# Altium PCB REF-Base.PcbDoc (part 2 of 2)
Units mm, origin at the board's own origin, x right, y up, seen from the top; angles counter-clockwise.
Board outline 48.01 x 58 mm, 4 copper layers (Top1, VCC, GND, Bottom2), stack 1.833 mm thick; 98 components, 129 nets, 444 pads, 192 vias.
Unrouted connection lines stored in the file: 57.
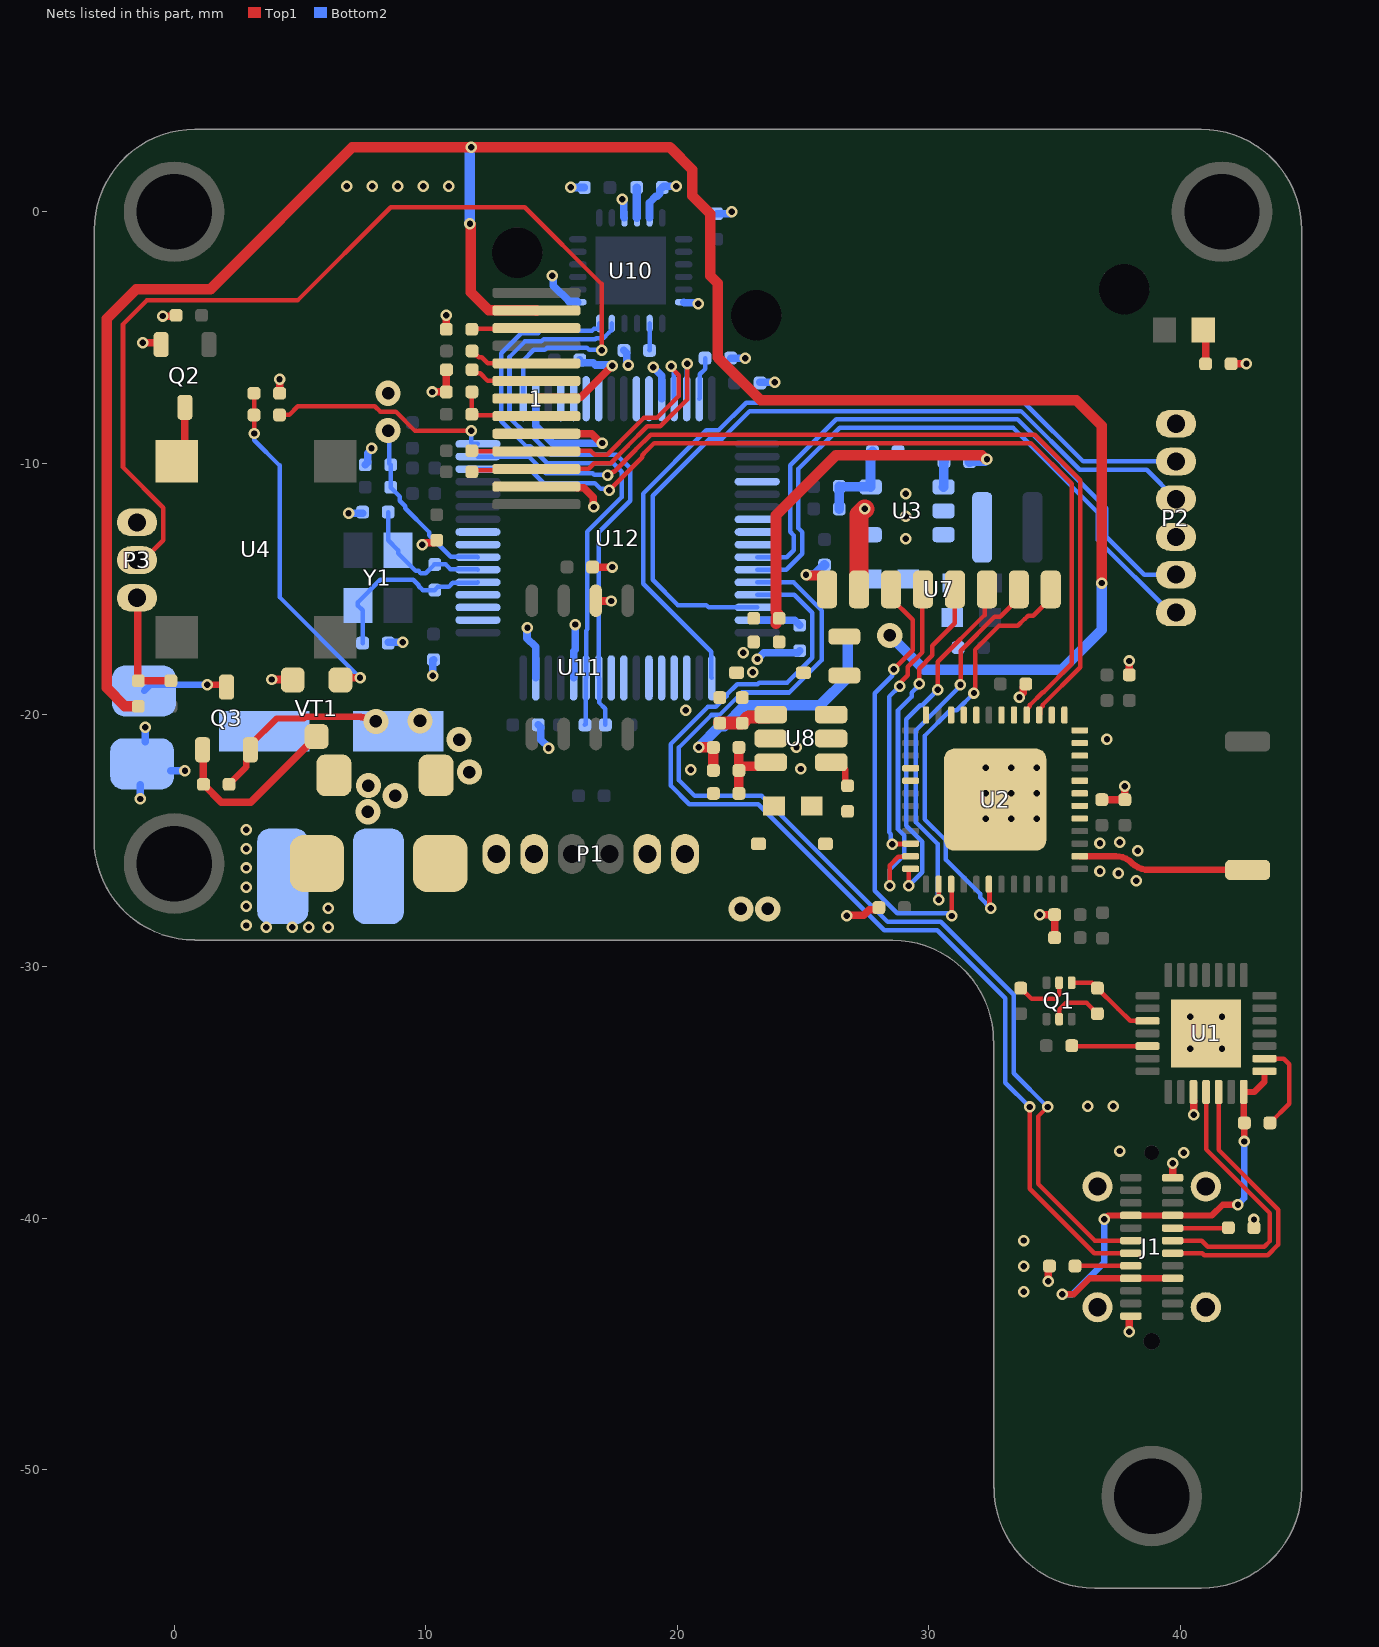
[diagram p4: the nets of this part, all layers, seen from the top]

## Via types
v1: diameter 0.457, hole 0.254, Top1 to Bottom2, tented both sides, 178 vias
v2: diameter 1, hole 0.5, Top1 to Bottom2, tented both sides, 12 vias
v3: diameter 0.457, hole 0.254, Top1 to Bottom2, 2 vias

## Nets (pads, with @x,y where several pads share a name; then routed paths per layer and width w, separated by ;. In a path a pad name is that pad's centre, name@x,y a point inside that pad or via, vN(x,y) a via of type N, cw(c..) or ccw(c..) an arc to the next point about the centre after c; other vN are vias at no path point) (continued)
GND: 1.7 1.9 1.12 C1.1 C2.1 C3.2 C4.1 C5.1 C6.2 C7.2 C9.2 C10.1 C14.1 C15.1 C16.1 C17.1 C18.1 C19.1 C20.2 C21.1 C22.1 C23.2 C24.1 C25.1 C26.1 C27.1 C28.1 C29.1 C30.1 C31.1 C34.1 C35.1 C36.1 C37.1 D3.1 D4.1 J1.A1 J1.B1 J1.S1 J1.S2 J1.S3 J1.S4 P1.5 P1.6 P2.1 P2.4 P3.3 pad.@4.318,-26.416 pad.@-1.27,-21.946 Q2.2 R8.2 R9.2 R10.1 R14.1 R15.2 R18.1 R22.2 R26.2 R35.1 U1.3 U1.29 U2.49 U3.2 U7.2 U8.2 U10.1 U10.9 U10.11 U10.18 U11.2 U12.18 U12.28 U12.60 U12.63 VT1.2 | length 51.8
  Top1 w0.3: v1(-1.245,-5.207) Q2.2@-0.686,-5.207 ; v1(-0.457,-4.144) R10.1@0.102,-4.144 ; v1(3.886,-18.593) VT1.2@4.445,-18.593 ; R15.2@4.191,-7.214 v1(4.191,-6.655) v1@4.242,-6.604 ; v1(9.859,-13.242) 9.901,-13.242 9.984,-13.16 10.335,-13.16 R26.2@10.439,-13.056 ; v1@10.236,-7.137 v1(10.262,-7.163) C26.1@10.82,-7.163 10.824,-7.159 10.824,-6.283 R22.2@10.827,-6.279 ; C27.1@10.82,-4.674 v1(10.82,-4.115) ; 1.9@14.402,-8.825 16.608,-8.825 16.976,-9.193 v1(17.018,-9.193) ; 1.7@14.402,-7.425 14.452,-7.375 16.171,-7.375 v1(17.424,-6.121) ; 1.12@15.949,-10.922 16,-10.973 16.282,-10.973 16.658,-11.349 16.658,-11.705 v1(16.688,-11.735) ; C18.1@16.711,-14.126 16.715,-14.122 v1(17.424,-14.122) ; U11.2@16.787,-15.472 v1(17.371,-15.472) ; v1(26.746,-27.991) 26.776,-27.961 27.419,-27.961 27.633,-27.747 27.93,-27.747 C37.1@28.016,-27.661 ; v1(33.604,-19.304) 33.604,-19.262 33.754,-19.112 33.754,-18.875 C22.1@33.884,-18.745 ; v1(34.417,-27.94) C2.1@35.001,-27.94 C1.1@35.001,-28.854 ; v1(34.747,-42.52) R9.2@34.747,-41.961 ; C19.1@36.881,-23.368 C21.1@37.795,-23.368 v1(37.795,-22.835) ; v1(37.973,-44.526) J1.A1@37.973,-43.967 ; C3.2@37.973,-18.415 v1(37.973,-17.856) ; J1.B1@39.7,-38.379 v1(39.7,-37.821) ; v1(40.538,-35.89) U1.3@40.538,-35.331 ; R18.1@42.069,-6.045 v1(42.628,-6.045)
  Top1 w0.762: U7.2@27.229,-15.011 27.229,-12.04 v1(27.457,-11.811)
  Bottom2 w0.3: v1(-1.346,-23.343) pad.@-1.346,-22.784 ; pad.@-1.151,-21.057 v1(-1.151,-20.498) ; pad.@-0.127,-22.225 v1(0.432,-22.225) ; v1(6.934,-11.989) C9.2@7.493,-11.989 ; C36.1@7.595,-10.058 7.699,-9.954 7.699,-9.59 7.849,-9.44 v1(7.849,-9.398) ; C7.2@8.507,-17.116 v1(9.091,-17.116) ; v1(10.287,-18.44) 10.287,-17.831 C28.1@10.312,-17.805 ; v1@14.028,-16.535 14.028,-16.949 14.378,-17.299 U12.63@14.378,-18.529 ; U12.18@14.378,-7.429 14.378,-8.51 15.06,-9.193 v1(17.018,-9.193) ; C29.1@14.478,-20.396 14.582,-20.5 14.582,-20.979 14.885,-21.282 v1(14.885,-21.324) ; v3(15.037,-2.54) 15.067,-2.57 15.067,-2.934 15.698,-3.566 16.028,-3.566 U10.1@16.053,-3.591 ; v1@15.748,0.991 15.773,0.965 C20.2@16.307,0.965 ; U12.60@15.878,-18.529 15.878,-17.48 15.951,-17.407 v1(15.951,-16.408) ; C31.1@16.129,-5.893 16.233,-5.997 16.657,-5.997 16.752,-6.091 17.394,-6.091 v1(17.424,-6.121) ; v1(17.821,0.492) 17.821,0.449 17.878,0.393 17.878,-0.216 U10.9@17.903,-0.241 ; C24.1@17.882,-5.512 17.986,-5.616 17.986,-5.921 v1@18.059,-5.994 ; U10.11@18.903,-0.241 18.898,-0.236 18.898,0.356 19.152,0.61 19.202,0.61 19.302,0.709 19.302,0.861 C23.2@19.406,0.965 19.456,1.016 v1(19.964,1.016) ; v1(19.053,-6.178) 19.053,-6.189 19.378,-6.514 U12.28@19.378,-7.429 ; U10.18@20.253,-3.591 20.278,-3.616 20.786,-3.616 v1(20.828,-3.658) ; C25.1@21.565,-0.076 22.098,-0.076 v1(22.174,0) ; C35.1@22.123,-5.817 v1(22.708,-5.817) ; v1(23.19,-17.78) 23.198,-17.78 23.444,-17.534 24.782,-17.534 C34.1@24.867,-17.45 ; C30.1@23.29,-6.778 v1(23.874,-6.778)
  other v1: 33.782,-42.926 33.782,-41.91 33.782,-40.894 42.926,-40.058 40.132,-37.412 37.592,-37.338 36.322,-35.56 37.338,-35.56 40.386,-33.274 41.656,-33.274 40.386,-32.004 41.656,-32.004 3.658,-28.448 4.699,-28.448 5.359,-28.448 6.121,-28.448 2.87,-28.372 6.121,-27.686 2.87,-27.61 2.87,-26.848 38.252,-26.594 37.541,-26.289 36.805,-26.213 2.87,-26.086 38.303,-25.4 2.87,-25.324 36.805,-25.095 37.592,-25.07 2.87,-24.562 32.258,-24.13 33.274,-24.13 34.29,-24.13 32.258,-23.114 33.274,-23.114 34.29,-23.114 20.539,-22.174 24.917,-22.149 32.258,-22.098 33.274,-22.098 34.29,-22.098 24.74,-21.285 37.084,-20.972 20.345,-19.812 22.997,-18.306 22.628,-17.534 14.046,-16.535 29.083,-12.995 29.083,-12.098 29.083,-11.201 18.059,-6.091 15.761,0.978 6.858,1.016 7.874,1.016 8.89,1.016 9.906,1.016 10.922,1.016
  other v2: 22.53,-27.711 23.597,-27.711 8.509,-7.213
GPIO2_1: U2.22
GPIO4_1: U2.24
GPIO5_1: U2.34 U7.4 | length 11.5
  Top1 w0.18: v1(28.549,-25.145) 28.563,-25.132 29.263,-25.132 U2.34@29.276,-25.118 ; v1(28.848,-18.854) 28.848,-18.746 29.166,-18.428 29.166,-18.091 29.74,-17.517 29.74,-15.04 U7.4@29.769,-15.011
  Bottom2 w0.18: v1(28.549,-25.145) 28.496,-25.092 28.496,-24.737 28.419,-24.661 28.419,-19.283 v1(28.848,-18.854)
GPIO9_1: U2.28
GPIO10_1: U2.29
GPIO12_1: U2.18
GPIO13_1: U2.20
GPIO14_1: U2.17
GPIO15_1: U2.21
GPIO18_1: U2.35 U7.5 | length 14.9
  Top1 w0.18: v1(28.448,-26.797) 28.448,-25.984 28.789,-25.643 29.251,-25.643 U2.35@29.276,-25.618 ; v1(29.616,-18.767) 29.616,-18.161 30.143,-17.634 30.143,-17.253 31.039,-16.358 U7.5@31.039,-15.011
  Bottom2 w0.18: v1(28.448,-26.797) 28.448,-26.137 29.02,-25.564 29.02,-24.791 28.776,-24.547 28.776,-19.814 29.315,-19.276 29.315,-19.122 29.616,-18.82 v1(29.616,-18.767)
GPIO19_1: U2.38 U7.7 | length 15.2
  Top1 w0.18: U2.38@30.389,-26.731 30.396,-26.738 30.396,-27.348 v1(30.404,-27.356) ; v1(31.259,-18.803) 31.267,-18.795 31.267,-17.45 32.614,-16.104 32.837,-16.104 33.579,-15.361 U7.7@33.579,-15.011
  Bottom2 w0.18: v1(30.404,-27.356) 30.351,-27.303 30.351,-25.131 29.489,-24.27 29.489,-20.61 31.259,-18.84 v1(31.259,-18.803)
GPIO21_1: U2.42 U7.8 | length 17.5
  Top1 w0.18: v1(31.796,-19.131) 31.838,-19.089 31.838,-17.413 32.791,-16.459 33.534,-16.459 33.807,-16.186 33.826,-16.186 33.96,-16.053 34.157,-16.053 34.849,-15.361 U7.8@34.849,-15.011 ; U2.42@32.389,-26.731 32.414,-26.756 32.414,-27.639 v1(32.461,-27.686)
  Bottom2 w0.18: v1(31.796,-19.131) 31.11,-19.817 30.85,-19.817 29.831,-20.836 29.831,-24.142 30.683,-24.994 30.683,-25.761 32.04,-27.118 32.04,-27.259 32.461,-27.68 v1(32.461,-27.686)
GPIO22_1: U2.39 U7.3 | length 17.7
  Top1 w0.18: U7.3@28.499,-15.011 28.499,-15.361 29.356,-16.218 29.356,-17.431 v1(28.6,-18.186) ; U2.39@30.889,-26.731 30.904,-26.745 30.904,-27.979 v1(30.918,-27.994)
  Bottom2 w0.18: v1(28.6,-18.186) 28.547,-18.239 28.547,-18.443 27.851,-19.139 27.851,-26.987 28.753,-27.889 30.739,-27.889 30.843,-27.994 v1(30.918,-27.994)
GPIO23_1: U2.36 U7.6 | length 14.5
  Top1 w0.18: v1(29.2,-26.797) 29.2,-26.143 29.225,-26.118 U2.36@29.276,-26.118 ; v1(30.353,-18.999) 30.353,-17.894 32.216,-16.031 32.216,-15.342 32.097,-15.223 U7.6@32.309,-15.011
  Bottom2 w0.18: v1(29.2,-26.797) 29.743,-26.254 29.743,-25.044 29.108,-24.409 29.108,-20.168 29.666,-19.61 29.742,-19.61 v1(30.353,-18.999)
GPIO25_1: U2.14
GPIO26_1: U2.15 U12.15 | length 35.7
  Top1 w0.18: v1(17.229,-10.467) 17.304,-10.467 17.443,-10.328 17.491,-10.328 18.357,-9.462 18.357,-9.449 18.944,-8.862 34.211,-8.862 36.017,-10.668 36.017,-18.109 34.522,-19.604 34.522,-19.66 34.424,-19.758 34.424,-19.97 U2.15@34.389,-20.005
  Bottom2 w0.18: U12.15@12.078,-9.729 14.102,-9.729 14.775,-10.403 16.641,-10.403 16.701,-10.463 17.225,-10.463 v1(17.229,-10.467)
GPIO27_1: U2.16 U12.14 | length 35.4
  Top1 w0.18: v1(17.302,-11.072) 18.611,-9.763 18.611,-9.678 18.689,-9.6 18.689,-9.586 19.082,-9.194 34.061,-9.194 35.685,-10.818 35.685,-17.971 34.562,-19.094 34.532,-19.094 34.022,-19.604 34.022,-19.66 33.924,-19.758 33.924,-19.97 U2.16@33.889,-20.005
  Bottom2 w0.18: U12.14@12.078,-10.229 14.132,-10.229 14.697,-10.795 16.73,-10.795 16.954,-11.019 17.249,-11.019 v1(17.302,-11.072)
GPIO32_1: U2.12
GPIO33_1: U2.13
GPIO34_1: U2.10
GPIO35_1: U2.11
GPIO37_1: U2.6
GPIO38_1: U2.7
I2C_SCL_1: U12.41
I2C_SDA_1: U12.40
IMU_SCL_1: R17.1 U10.23 U12.58 | length 23.6
  Bottom2 w0.18: R17.1@17.145,-20.396 17.145,-19.761 16.891,-19.507 16.891,-18.543 U12.58@16.878,-18.529 16.878,-12.739 18.126,-11.49 18.126,-10.201 17.594,-9.669 17.55,-9.669 17.545,-9.664 14.976,-9.664 14.161,-8.848 13.991,-8.848 13.333,-8.19 13.333,-5.77 13.948,-5.155 14.604,-5.155 14.695,-5.064 16.75,-5.064 16.78,-5.033 17.055,-5.033 17.27,-4.818 17.403,-4.685 U10.23@17.403,-4.441
IMU_SDA_1: R7.1 U10.24 U12.59 | length 23.5
  Bottom2 w0.18: R7.1@16.332,-20.396 16.355,-20.374 16.355,-18.552 U12.59@16.378,-18.529 16.378,-16.648 16.422,-16.603 16.422,-12.712 17.794,-11.34 17.794,-10.339 17.456,-10.001 17.413,-10.001 17.407,-9.996 14.838,-9.996 14.155,-9.313 13.986,-9.313 13.001,-8.327 13.001,-5.618 13.795,-4.823 14.466,-4.823 14.558,-4.732 16.612,-4.732 16.691,-4.653 16.87,-4.653 16.903,-4.62 U10.24@16.903,-4.441
Net1_3: 1.3 C27.2 | length 2.6
  Top1 w0.18: C27.2@11.836,-4.674 11.861,-4.649 14.377,-4.649 1.3@14.402,-4.625
Net1_5: 1.5 R23.1 | length 2.8
  Top1 w0.18: R23.1@11.843,-5.537 11.863,-5.537 12.113,-5.787 12.224,-5.787 12.462,-6.025 1.5@14.402,-6.025
Net1_6: 1.6 R22.1 | length 2.7
  Top1 w0.18: R22.1@11.843,-6.279 11.984,-6.421 12.169,-6.421 12.473,-6.725 1.6@14.402,-6.725
Net1_8: 1.8 C26.2 R21.1 | length 3.5
  Top1 w0.18: C26.2@11.836,-7.163 R21.1@11.836,-8.052 11.873,-8.088 14.365,-8.088 1.8@14.402,-8.125
NetA1_1: A1.1 U2.2 | length 6.8
  Top1 w0.254: U2.2@36.002,-25.618 37.436,-25.618 cw(c37.436,-26.521) 38.075,-25.883 ccw(c38.749,-25.208) 38.749,-26.162 A1.1@42.672,-26.162
NetC7_1: C7.1 R30.1 U12.5 Y1.3 | length 7.2
  Bottom2 w0.18: C7.1@7.493,-17.145 7.493,-15.845 Y1.3@7.303,-15.654 7.303,-15.529 8.201,-14.63 9.511,-14.63 9.731,-14.851 9.731,-14.888 9.881,-15.037 R30.1@10.363,-15.037 10.485,-14.915 10.917,-14.915 11.083,-14.749 12.058,-14.749 U12.5@12.078,-14.729
NetC8_1: C8.1 C12.1 D4.2 L1.1 U8.6
NetC8_2: C8.2 C12.2 U8.1 | length 2.2
  Top1 w0.52: C12.2@21.692,-20.328 C8.2@22.581,-20.328 22.831,-20.078 23.627,-20.078 U8.1@23.717,-19.988
NetC9_1: C9.1 R30.2 U12.6 Y1.1 | length 5.5
  Bottom2 w0.18: C9.1@8.509,-11.938 8.509,-13.061 Y1.1@8.903,-13.454 8.903,-13.579 9.601,-14.278 9.717,-14.278 9.803,-14.364 10.006,-14.364 10.349,-14.021 R30.2@10.363,-14.021 10.795,-14.021 10.984,-14.21 12.058,-14.21 U12.6@12.078,-14.229
NetC11_2: C11.2 R11.1 R14.2 U8.3 | length 3
  Top1 w0.381: R14.2@22.454,-23.122 C11.2@22.454,-21.293 ; R11.1@22.614,-22.047 23.558,-22.047 U8.3@23.717,-21.888
NetC13_1: C13.1 R33.1 R35.2 U3.5 | length 3.6
  Bottom2 w0.39: C13.1@26.441,-11.811 R33.1@26.441,-10.922 26.449,-10.93 27.68,-10.93 U3.5@27.687,-10.937 27.687,-9.6 R35.2@27.762,-9.525
NetC16_2: C16.2 D5.2 R16.1 U8.5
NetC23_1: C23.1 U10.10 | length 1.2
  Bottom2 w0.33: C23.1@18.39,0.965 18.396,0.959 18.396,-0.234 U10.10@18.403,-0.241
NetC24_2: C24.2 U10.20 | length 1.1
  Bottom2 w0.18: C24.2@18.898,-5.512 18.9,-5.509 18.9,-4.443 U10.20@18.903,-4.441
NetC34_2: C34.2 U12.47 | length 1.8
  Bottom2 w0.3: U12.47@23.178,-16.229 24.662,-16.229 C34.2@24.867,-16.434
NetC35_2: C35.2 U12.31 | length 1.7
  Bottom2 w0.18: U12.31@20.878,-7.429 20.901,-7.406 20.901,-6.463 21.115,-6.248 21.115,-5.825 C35.2@21.107,-5.817
NetJ1_A5: J1.A5 R9.1 | length 2.2
  Top1 w0.18: R9.1@35.826,-41.898 J1.A5@38.032,-41.898
NetJ1_B5: J1.B5 R8.1 | length 2.2
  Top1 w0.18: J1.B5@39.692,-40.398 41.898,-40.398 R8.1@41.91,-40.386
NetL2_1: L2.1 U3.3
NetLED1_C: LED1.C R18.2 | length 1.4
  Top1 w0.3: LED1.C@40.908,-4.699 41.002,-4.793 R18.2@41.002,-6.045
NetP3_1: P3.1 R27.1 R29.1 | length 4.6
  Top1 w0.3: P3.1@-1.473,-15.344 -1.448,-15.37 -1.448,-18.618 R29.1@-1.422,-18.644 R27.1@-0.127,-18.644
NetQ1_2: Q1.2 R4.2 | length 2.2
  Top1 w0.18: R4.2@33.655,-30.861 34.087,-31.293 35.001,-31.293 35.179,-31.115 Q1.2@35.179,-30.646
NetQ1_5: Q1.5 R6.2 | length 2.2
  Top1 w0.18: Q1.5@35.179,-32.092 35.179,-31.725 35.458,-31.445 36.271,-31.445 R6.2@36.703,-31.877
NetQ2_3: Q2.3 U4.2 | length 2.3
  Top1 w0.3: U4.2@0.101,-9.965 0.432,-9.634 Q2.3@0.432,-7.774
NetQ3_1: Q3.1 R12.1 VT1.3 | length 7.3
  Top1 w0.3: Q3.1@1.133,-21.388 1.151,-21.406 1.151,-22.741 R12.1@1.168,-22.758 1.88,-23.47 3.048,-23.47 5.657,-20.861 VT1.3@5.664,-20.861
NetR1_2: R1.2 U1.9 | length 3.7
  Top1 w0.18: U1.9@43.345,-33.664 44.104,-33.664 44.323,-33.884 44.323,-35.458 R1.2@43.561,-36.22
NetR3_2: R3.2 U1.26 | length 3
  Top1 w0.18: R3.2@35.704,-33.164 U1.26@38.697,-33.164
NetR13_2: R13.2 R15.1 VT1.1 | length 13.9
  Top1 w0.18: R15.1@3.175,-7.214 3.179,-7.218 3.179,-8.81 v1(3.183,-8.814)
  Top1 w0.3: VT1.1@6.614,-18.611 6.708,-18.517 v1(7.391,-18.517)
  Bottom2 w0.18: v1(3.183,-8.814) 3.183,-9.076 4.191,-10.084 4.191,-15.316 v1(7.391,-18.517)
NetR16_2: R16.2 U8.4 | length 1.4
  Top1 w0.254: U8.4@26.117,-21.888 26.391,-21.888 26.686,-22.182 26.686,-22.732 R16.2@26.772,-22.817
NetR34_1: R34.1 U3.1 | length 1
  Bottom2 w0.39: U3.1@30.583,-10.937 30.595,-10.925 30.595,-9.943 R34.1@30.607,-9.931
NRST_1: C36.2 R28.1 U12.7 | length 7.1
  Bottom2 w0.18: v2@8.509,-8.712 8.56,-8.763 8.56,-10.008 C36.2@8.611,-10.058 R28.1@8.611,-10.947 8.611,-10.962 8.968,-11.319 8.968,-11.486 9.19,-11.708 9.19,-11.786 10.135,-12.731 10.135,-12.852 10.992,-13.71 12.058,-13.71 U12.7@12.078,-13.729
  other v2: 8.509,-8.698
OLED_SCL_1: 1.10 R20.1 U12.29 | length 11.8
  Top1 w0.18: R20.1@11.836,-9.5 11.849,-9.512 14.389,-9.512 1.10@14.402,-9.525 14.419,-9.508 16.56,-9.508 16.716,-9.664 17.215,-9.664 17.692,-9.187 17.692,-9.173 18.669,-8.197 19.192,-8.197 20.064,-7.325 20.064,-6.492 v1@19.82,-6.248
  Bottom2 w0.18: v1(19.761,-6.147) 19.761,-6.222 19.855,-6.315 19.855,-7.406 U12.29@19.878,-7.429
OLED_SDA_1: 1.11 R19.1 U12.30 | length 12.6
  Top1 w0.18: R19.1@11.836,-10.338 11.893,-10.281 14.345,-10.281 14.413,-10.214 16.483,-10.214 16.701,-9.996 17.353,-9.996 18.025,-9.324 18.025,-9.311 18.806,-8.529 19.329,-8.529 20.396,-7.462 v1(20.396,-6.045)
  Bottom2 w0.18: U12.30@20.378,-7.429 20.387,-7.42 20.387,-6.054 v1(20.396,-6.045)
PA4_1: U12.20
PA6_1: U12.22
PB0_1: U12.26
PB1_1: U12.27
PC0_1: U12.8
PC1_1: U12.9
PC8_1: U12.39
PC13_1: U12.2
PC14_1: U12.3
PC15_1: U12.4
PWM_A1_1: R13.1 U12.16 | length 8.9
  Top1 w0.18: R13.1@4.191,-8.077 4.572,-8.077 4.913,-7.736 7.981,-7.736 8.201,-7.956 8.819,-7.956 9.576,-8.712 v1(11.811,-8.712)
  Bottom2 w0.18: v1(11.811,-8.712) 11.811,-9.174 11.866,-9.229 U12.16@12.078,-9.229
PWM_A2_1: P3.2 U12.17 | length 40.7
  Top1 w0.18: P3.2@-1.827,-13.845 P3.2@-1.473,-13.845 -1.223,-13.845 -0.431,-13.052 -0.431,-11.761 -2.032,-10.16 -2.032,-4.47 -1.087,-3.526 4.907,-3.526 8.611,0.178 13.945,0.178 16.993,-2.87 v1(16.993,-5.504)
  Bottom2 w0.18: U12.17@13.878,-7.429 13.878,-5.909 14.299,-5.488 14.742,-5.488 14.833,-5.396 16.409,-5.396 16.494,-5.481 16.97,-5.481 v1(16.993,-5.504)
PWM_B2_1: U12.36
RTS_1: Q1.1 R6.1 U1.24 | length 3.6
  Top1 w0.18: Q1.1@35.679,-30.646 36.488,-30.646 R6.1@36.703,-30.861 37.516,-31.674 38.006,-32.164 U1.24@38.697,-32.164
SENSOR_VN_1: U2.8
SENSOR_VP_1: U2.5
SPI1_MISO_1: U12.56
SPI1_MOSI_1: U12.23
SPI1_SCK_1: U12.21
SPI3_MISO_1: U12.52
SPI3_MOSI_1: U12.57
SPI3_SCK_1: U12.51
SWCLK_1: P2.2 U12.49 | length 32.1
  Bottom2 w0.18: U12.49@21.378,-18.529 21.355,-18.506 21.355,-17.494 18.644,-14.783 18.644,-11.201 21.16,-8.685 21.643,-8.685 22.74,-7.588 33.801,-7.588 36.139,-9.926 P2.2@39.827,-9.926
SWDIO_1: P2.3 U12.46 | length 31.6
  Bottom2 w0.18: U12.46@23.178,-15.729 21.248,-15.729 21.151,-15.633 20.027,-15.633 19.025,-14.63 19.025,-11.29 21.298,-9.017 21.781,-9.017 22.877,-7.92 33.663,-7.92 36.004,-10.262 38.663,-10.262 P2.3@39.827,-11.426
SWITCH_LED+_1: pad.@-1.194,-19.05 Q3.3 | length 3.4
  Top1 w0.254: v1(1.321,-18.796) 1.983,-18.796 Q3.3@2.083,-18.896
  Bottom2 w0.254: pad.@-1.194,-19.05 -0.94,-18.796 v1(1.321,-18.796)
UART1_Rx_1: P2.6 U12.43 | length 24.9
  Bottom2 w0.18: U12.43@23.178,-14.229 24.328,-14.229 24.968,-13.589 24.968,-12.731 24.82,-12.583 24.82,-10.22 26.454,-8.585 33.35,-8.585 33.833,-9.068 36.726,-11.961 36.726,-13.053 39.599,-15.926 P2.6@39.827,-15.926
UART1_Tx_1: P2.5 U12.42 | length 24.3
  Bottom2 w0.18: U12.42@23.178,-13.729 24.358,-13.729 24.636,-13.451 24.636,-12.869 24.487,-12.72 24.487,-10.082 26.317,-8.253 33.525,-8.253 37.059,-11.786 37.059,-12.916 38.569,-14.426 P2.5@39.827,-14.426
UART5_Rx_1: U12.54
UART5_Tx_1: U12.53
USB_DM_1: J1.A7 U12.44 | length 43.1
  Top1 w0.18: v1(34.722,-35.585) 34.343,-35.964 34.343,-38.636 36.605,-40.898 J1.A7@38.032,-40.898
  Bottom2 w0.18: U12.44@23.178,-14.729 24.623,-14.729 25.745,-15.851 25.745,-17.818 24.454,-19.109 22.573,-19.109 21.678,-20.004 21.36,-20.004 20.068,-21.296 20.068,-22.599 20.691,-23.221 23.361,-23.221 28.361,-28.222 30.48,-28.222 33.378,-31.119 33.378,-34.241 v1(34.722,-35.585)
USB_DP_1: J1.A6 U12.45 | length 42.9
  Top1 w0.18: v1(34.011,-35.585) 34.011,-38.837 36.572,-41.398 J1.A6@38.032,-41.398
  Bottom2 w0.18: U12.45@23.178,-15.229 24.653,-15.229 25.363,-15.94 25.363,-17.73 24.378,-18.715 23.254,-18.715 23.192,-18.777 22.38,-18.777 21.96,-19.197 21.96,-19.252 21.54,-19.672 21.222,-19.672 19.736,-21.158 19.736,-22.809 20.48,-23.554 23.224,-23.554 28.224,-28.554 30.342,-28.554 33.045,-31.257 33.045,-34.62 v1(34.011,-35.585)
USB_ESP_DM_1: J1.B7 U1.5 | length 11.5
  Top1 w0.18: J1.B7@39.692,-41.398 40.877,-41.398 40.956,-41.476 43.47,-41.476 43.893,-41.053 43.893,-39.668 41.521,-37.295 U1.5@41.521,-34.989
USB_ESP_DP_1: J1.B6 U1.4 | length 11
  Top1 w0.18: J1.B6@39.692,-40.898 40.847,-40.898 41.093,-41.144 43.333,-41.144 43.561,-40.916 43.561,-39.805 41.021,-37.265 U1.4@41.021,-34.989
VCC: C6.1 D2.2 D3.2 D5.1 Q3.2 R12.2 | length 8
  Top1 w0.254: R12.2@2.184,-22.758 2.874,-22.069 2.874,-21.547 Q3.2@3.033,-21.388 3.033,-21.188 4.079,-20.142 5.152,-20.142 5.215,-20.079 7.423,-20.079 7.436,-20.091 7.518,-20.091 7.541,-20.114 7.879,-20.114 v2(8.022,-20.257) ; D2.2@10.008,-21.996 D2.2@10.414,-22.403
  other v2: 11.74,-22.274 11.328,-20.98 9.775,-20.231
VCC_3V3_RD: R31.2 U7.1 | length 2.5
  Top1 w0.39: v1(25.121,-14.427) 25.139,-14.427 25.171,-14.459 25.754,-14.459 25.959,-14.664 U7.1@25.959,-15.011 U7.1@25.959,-15.361
  Bottom2 w0.39: v1(25.121,-14.427) 25.476,-14.427 R31.2@25.857,-14.046 R31.2@25.848,-14.037
VCC_5V: 1.2 C11.1 C14.2 C15.2 C17.2 L1.2 R11.2 R29.2 R34.2 U3.4 | length 118.1
  Top1 w0.42: R29.2@-1.422,-19.66 -1.43,-19.652 -1.956,-19.652 -2.683,-18.925 -2.683,-4.257 -1.499,-3.073 1.448,-3.073 7.087,2.565 19.71,2.565 20.599,1.676 20.599,0.631 21.315,-0.084 21.315,-2.537 21.615,-2.838 21.615,-5.791 23.317,-7.493 35.865,-7.493 36.881,-8.509 v1(36.881,-14.757) ; v1(11.76,-0.483) 11.786,-0.508 11.786,-3.2 12.5,-3.915 14.392,-3.915 1.2@14.402,-3.925 ; v1(20.853,-21.285) 20.857,-21.289 21.434,-21.289 C11.1@21.438,-21.293 R11.2@21.438,-22.208 ; C14.2@23.927,-16.377 C14.2@23.927,-16.162 ; C14.2@24.01,-16.162 24.01,-15.982 23.927,-15.899 23.927,-12.065 26.31,-9.681 32.103,-9.681 32.264,-9.843 v1(32.313,-9.843)
  Bottom2 w0.42: v1(11.76,-0.483) 11.76,2.505 11.811,2.555 v1(11.811,2.565) ; v1(20.853,-21.285) 21.682,-20.457 21.865,-20.457 22.713,-19.609 25.679,-19.609 26.772,-18.517 26.772,-16.993 ; v2(28.448,-16.84) 29.82,-18.212 35.281,-18.212 36.881,-16.612 v1(36.881,-14.757) ; R34.2@31.623,-9.931 31.667,-9.887 32.22,-9.887 32.264,-9.843 v1(32.313,-9.843)
VCC_IN: D2.1 P1.1 P1.2 pad.@8.128,-26.416
  other v2: 7.701,-23.849 8.793,-23.214 7.722,-22.809
VDD_USB: J1.A4 J1.A9 J1.B4 J1.B9 R1.1 U1.7 U1.8 | length 20.1
  Top1 w0.254: v1(35.306,-43.028) 35.763,-43.028 36.393,-42.398 J1.A4@38.032,-42.398 J1.B9@39.692,-42.398 ; v1(36.982,-40.056) 37.14,-39.898 J1.A9@38.032,-39.898 J1.B4@39.692,-39.898 41.255,-39.898 41.681,-39.472 v1(42.291,-39.472) ; R1.1@42.521,-36.196 U1.7@42.521,-34.989 42.939,-34.989 43.345,-34.582 U1.8@43.345,-34.164 ; v1(42.545,-36.957) R1.1@42.545,-36.22
  Bottom2 w0.254: v1(35.306,-43.028) 35.712,-43.028 36.982,-41.758 v1(36.982,-40.056) ; v1(42.291,-39.472) 42.545,-39.218 v1(42.545,-36.957)
pads on no net: 1.1 1.13 A1. J1. J1.A2 J1.A3 J1.A8 J1.A10 J1.A11 J1.A12 J1.B2 J1.B3 J1.B8 J1.B10 J1.B11 J1.B12 U1.1 U1.2 U1.6 U1.10 U1.11 U1.12 U1.13 U1.14 U1.15 U1.16 U1.17 U1.18 U1.19 U1.20 U1.21 U1.22 U1.23 U1.27 U2.26 U2.44 U2.45 U2.47 U2.48 U4.3 U4.4 U10. U10.2 U10.3 U10.4 U10.5 U10.6 U10.7 U10.12 U10.14 U10.15 U10.16 U10.17 U10.19 U10.21 U10.22 U11.5 U11.8 Y1.2 Y1.4
copper on no net:
  other v3: 18.11,-2.261

## Polygon pours and split planes (outlines as drawn)
GND on Top1 "GND_L01_P014" (solid, pour order 14): 23.425,-15.731 23.425,-18.51 23.292,-18.644 21.615,-18.644 21.387,-18.872 21.209,-18.872 20.955,-19.126 20.955,-22.458 21.136,-22.639 21.895,-22.639 22.111,-22.855 22.111,-23.372 22.208,-23.47 22.987,-23.47 23.216,-23.241 23.216,-22.809 23.566,-22.458 24.328,-22.458 24.638,-22.149 24.638,-21.658 24.417,-21.438 22.979,-21.438 22.835,-21.293 22.835,-20.752 23.089,-20.498 24.892,-20.498 25.197,-20.803 25.197,-22.53 24.968,-22.758 24.536,-22.758 24.486,-22.809 24.486,-24.181 24.308,-24.359 23.064,-24.359 22.429,-23.724 21.29,-23.724 20.091,-22.525 20.091,-17.424 21.785,-15.731 23.546,-15.731
VCC_5V on Top1 "VCC_5V_L01_P022" (solid, pour order 22): 23.622,-17.331 23.622,-15.878 23.825,-15.674 25.072,-15.674 25.654,-16.256 28.905,-16.256 29.007,-16.358 29.007,-17.221 28.778,-17.45 23.741,-17.45 23.622,-17.331 23.622,-15.807 23.698,-15.731
NetC16_2 on Top1 "NETC16_2_L01_P010" (solid, pour order 10): 24.605,-22.985 24.605,-26.56 24.74,-26.695 27.635,-26.695 28.067,-26.264 28.067,-20.676 27.889,-20.498 25.298,-20.498 25.222,-20.574 25.222,-21.285 25.349,-21.412 27.051,-21.412 27.267,-21.629 27.267,-24.32 27.102,-24.486 26.314,-24.486 26.06,-24.232 26.06,-22.86 25.984,-22.784 24.805,-22.784
VCC on Top1 "VCC_L01_P017" (solid, pour order 17): 9.487,-22.39 8.709,-21.612 7.363,-21.612 7.15,-21.399 7.15,-20.079 7.696,-19.533 11.1,-19.533 13.818,-22.25 19.482,-22.25 21.031,-23.8 22.34,-23.8 23.153,-24.613 23.622,-24.613 23.927,-24.917 23.927,-25.806 23.774,-25.959 21.819,-25.959 21.191,-25.331 21.191,-24.597 21.105,-24.511 19.583,-24.511 18.491,-23.419 12.391,-23.419 11.972,-23.838 11.972,-26.433 11.735,-26.67 9.677,-26.67 9.487,-26.479
NetC8_1 on Top1 "NETC8_1_L01_P012" (solid, pour order 12): 21.539,-19.699 22.82,-19.699 23.132,-19.388 24.849,-19.388 25.07,-19.609 25.07,-20.168 25.248,-20.345 27.788,-20.345 28.042,-20.091 28.042,-17.805 27.864,-17.628 24.181,-17.628 23.944,-17.865 23.944,-18.489 23.502,-18.931 21.557,-18.931 21.361,-19.126 21.361,-19.634 21.407,-19.679 21.539,-19.679
NetC16_2 on Top1 "NETC16_2_L01_P011" (solid, pour order 11): 27.364,-23.325 27.432,-23.393 27.432,-24.74 27.356,-24.816 26.197,-24.816 25.875,-24.494 25.875,-23.258 25.941,-23.325
VCC_IN on Top1 "VCC_IN_L01_P006" (solid, pour order 6): 7.061,-26.721 7.061,-24.206 6.782,-23.927 5.305,-23.927 5.131,-23.753 5.131,-21.946 5.309,-21.768 7.341,-21.768 7.722,-22.149 8.585,-22.149 9.246,-22.809 9.246,-26.365 9.017,-26.594 7.239,-26.594 7.036,-26.391
GND on Top1 "GND_L01_P000" (solid, pour order 0): 6.655,-24.46 6.655,-27.127 6.756,-27.229 12.217,-27.229 12.217,-24.003 15.011,-24.003 15.011,-29.032 2.261,-29.032 2.083,-28.854 2.083,-27.407 2.413,-27.076 2.413,-24.511 2.616,-24.308 6.477,-24.308 6.629,-24.46
VCC_5V on Bottom2 "VCC_5V_L04_P018" (solid, pour order 18): 29.108,-17.221 29.108,-16.18 28.346,-15.418 28.346,-12.522 28.042,-12.217 26.873,-12.217 26.34,-12.751 26.34,-17.12 26.645,-17.424 28.905,-17.424 29.134,-17.196
3V3 on Bottom2 "3V3_L04_P021" (solid, pour order 21): 31.75,-17.323 31.75,-14.351 31.852,-14.249 32.987,-14.249 33.165,-14.072 33.165,-10.828 33.299,-10.693 34.9,-10.693 35.077,-10.871 35.077,-17.475 34.849,-17.704 31.947,-17.704 31.794,-17.551
NetL2_1 on Bottom2 "NETL2_1_L04_P020" (solid, pour order 20): 31.153,-12.446 31.471,-12.128 31.471,-11.024 31.674,-10.82 31.674,-10.795 32.842,-10.795 32.995,-10.947 32.995,-13.911 32.936,-13.97 31.674,-13.97 31.141,-13.437 30.074,-13.437 29.947,-13.31 29.947,-12.523 30.023,-12.446
GND on Bottom2 "GND_L04_P019" (solid, pour order 19): 31.572,-14.174 30.988,-13.589 29.855,-13.589 29.703,-13.437 29.703,-12.486 29.87,-12.319 31.064,-12.319 31.242,-12.141 31.242,-11.582 31.064,-11.405 29.947,-11.405 29.693,-11.151 29.693,-9.119 29.54,-8.966 28.397,-8.966 28.27,-9.093 28.27,-10.389 28.654,-10.773 28.654,-15.218 29.616,-16.18 29.616,-17.45 29.921,-17.755 31.267,-17.755 31.572,-17.45
VCC_IN on Bottom2 "VCC_IN_L04_P015" (solid, pour order 15): 7.036,-27.051 7.036,-28.575 7.112,-28.651 21.488,-28.651 21.59,-28.55 21.59,-24.359 21.336,-24.105 18.44,-24.105 18.212,-24.333 18.212,-26.314 18.009,-26.518 8.611,-26.518 8.077,-27.051
GND on Bottom2 "GND_L04_P009" (solid, pour order 9): 4.928,-21.742 5.131,-21.539 6.248,-21.539 6.502,-21.285 6.502,-19.812 6.325,-19.634 2.533,-19.634 2.413,-19.914 2.413,-24.562 4.724,-24.562 4.928,-24.359
VCC on Bottom2 "VCC_L04_P008" (solid, pour order 8): 9.474,-22.454 8.636,-21.615 7.366,-21.615 7.036,-21.285 7.036,-20.193 7.264,-19.964 11.1,-19.964 12.116,-20.98 12.116,-23.08 11.828,-23.368 9.654,-23.368 9.474,-23.188
VCC_IN on Bottom2 "VCC_IN_L04_P004" (solid, pour order 4): 7.061,-27.076 7.061,-24.003 7.036,-23.978 5.283,-23.978 5.131,-23.825 5.131,-21.946 5.309,-21.768 7.341,-21.768 7.722,-22.149 8.611,-22.149 9.195,-22.733 9.195,-27.254 7.239,-27.254 7.036,-27.051
GND on Bottom2 "GND_L04_P002" (solid, pour order 2): 2.616,-24.308 6.502,-24.308 6.655,-24.46 6.655,-28.651 6.579,-28.727 2.139,-28.727 2.083,-28.671 2.083,-27.407 2.413,-27.076 2.413,-24.511
GND on GND (split plane): 164 vertices, not listed, extent -2.669,-54.21 44.319,2.772
3V3 on VCC (split plane): 164 vertices, not listed, extent -2.669,-54.21 44.319,2.772

## Keep-outs
Keep-Out Layer:
  lines w0.254: -3.18,-24.948 ccw(c0.82,-24.948) 0.82,-28.948 ; -3.172,-24.948 -3.172,-16.506 -3.172,-0.719 cw(c0.828,-0.719) 0.828,3.281 40.828,3.281 cw(c40.828,-0.719) 44.828,-0.719 44.828,-50.719 cw(c40.828,-50.719) 40.828,-54.719 36.594,-54.719 cw(c36.594,-50.719) 32.594,-50.719 ; 0.82,-28.956 28.571,-28.956 ; 28.571,-28.961 cw(c28.571,-32.961) 32.571,-32.961 ; 32.576,-50.737 32.576,-32.961

## Other copper
Top1:
  rectangle net GND: 14.783,-28.626 24.054,-26.645
  pour cut-out: 36.474,6.045 36.474,-6.833 24.384,-6.833 24.384,6.045
  pour cut-out: 46.228,-18.288 46.228,-29.21 38.608,-29.21 38.608,-18.288
  text "L1" at 41.372,-48.29 h1
Bottom2:
  pour cut-out: 36.474,5.944 36.474,-6.934 24.384,-6.934 24.384,5.944
  pour cut-out: 46.228,-18.288 46.228,-29.21 38.608,-29.21 38.608,-18.288
  text "L4" at 41.372,-48.29 h1
VCC (plane layer: these items are gaps in the copper):
  rectangle: 15.265,-24.079 17.145,-21.082
  rectangle: 2.083,-29.235 21.031,-23.8
  text "L2" at 41.372,-48.29 h1
GND (plane layer: these items are gaps in the copper):
  rectangle: 15.265,-24.079 17.145,-21.082
  rectangle: 2.083,-29.235 20.955,-23.851
  text "L3" at 41.372,-48.29 h1

## Silkscreen, mask and mechanical layers (free items; w line width, h text height)
Top Overlay:
  text "HENGX" at 2.1,-0.99 h2
Bottom Overlay:
  lines w0.254: -3.054,-6 12,-6 12,3.288 ; 29.656,3.316 29.656,-6 44.735,-6
Top Solder:
  rectangle: 24.282,-6.883 36.373,6.121
  rectangle: 38.608,-29.21 46.228,-18.288
Bottom Solder:
  rectangle: 24.282,-6.883 36.373,6.121
  rectangle: 38.608,-29.21 46.228,-18.288
  text "+" at 16.229,-28.047 h3.81
Mechanical 1:
  lines w0.254: -3.18,-24.948 ccw(c0.82,-24.948) 0.82,-28.948 ; -3.172,-24.948 -3.172,-16.506 -3.172,-0.719 cw(c0.828,-0.719) 0.828,3.281 40.828,3.281 cw(c40.828,-0.719) 44.828,-0.719 44.828,-50.719 cw(c40.828,-50.719) 40.828,-54.719 36.594,-54.719 cw(c36.594,-50.719) 32.594,-50.719 ; 0.82,-28.956 28.571,-28.956 ; 28.571,-28.961 cw(c28.571,-32.961) 32.571,-32.961 ; 32.576,-50.737 32.576,-32.961